# Altium PCB Chov2.PcbDoc
Units mm, origin at the board's own origin, x right, y up, seen from the top; angles counter-clockwise.
Board outline 57 x 36.4 mm, 2 copper layers (Top Layer, Bottom Layer); 66 components, 86 nets, 235 pads, 36 vias.
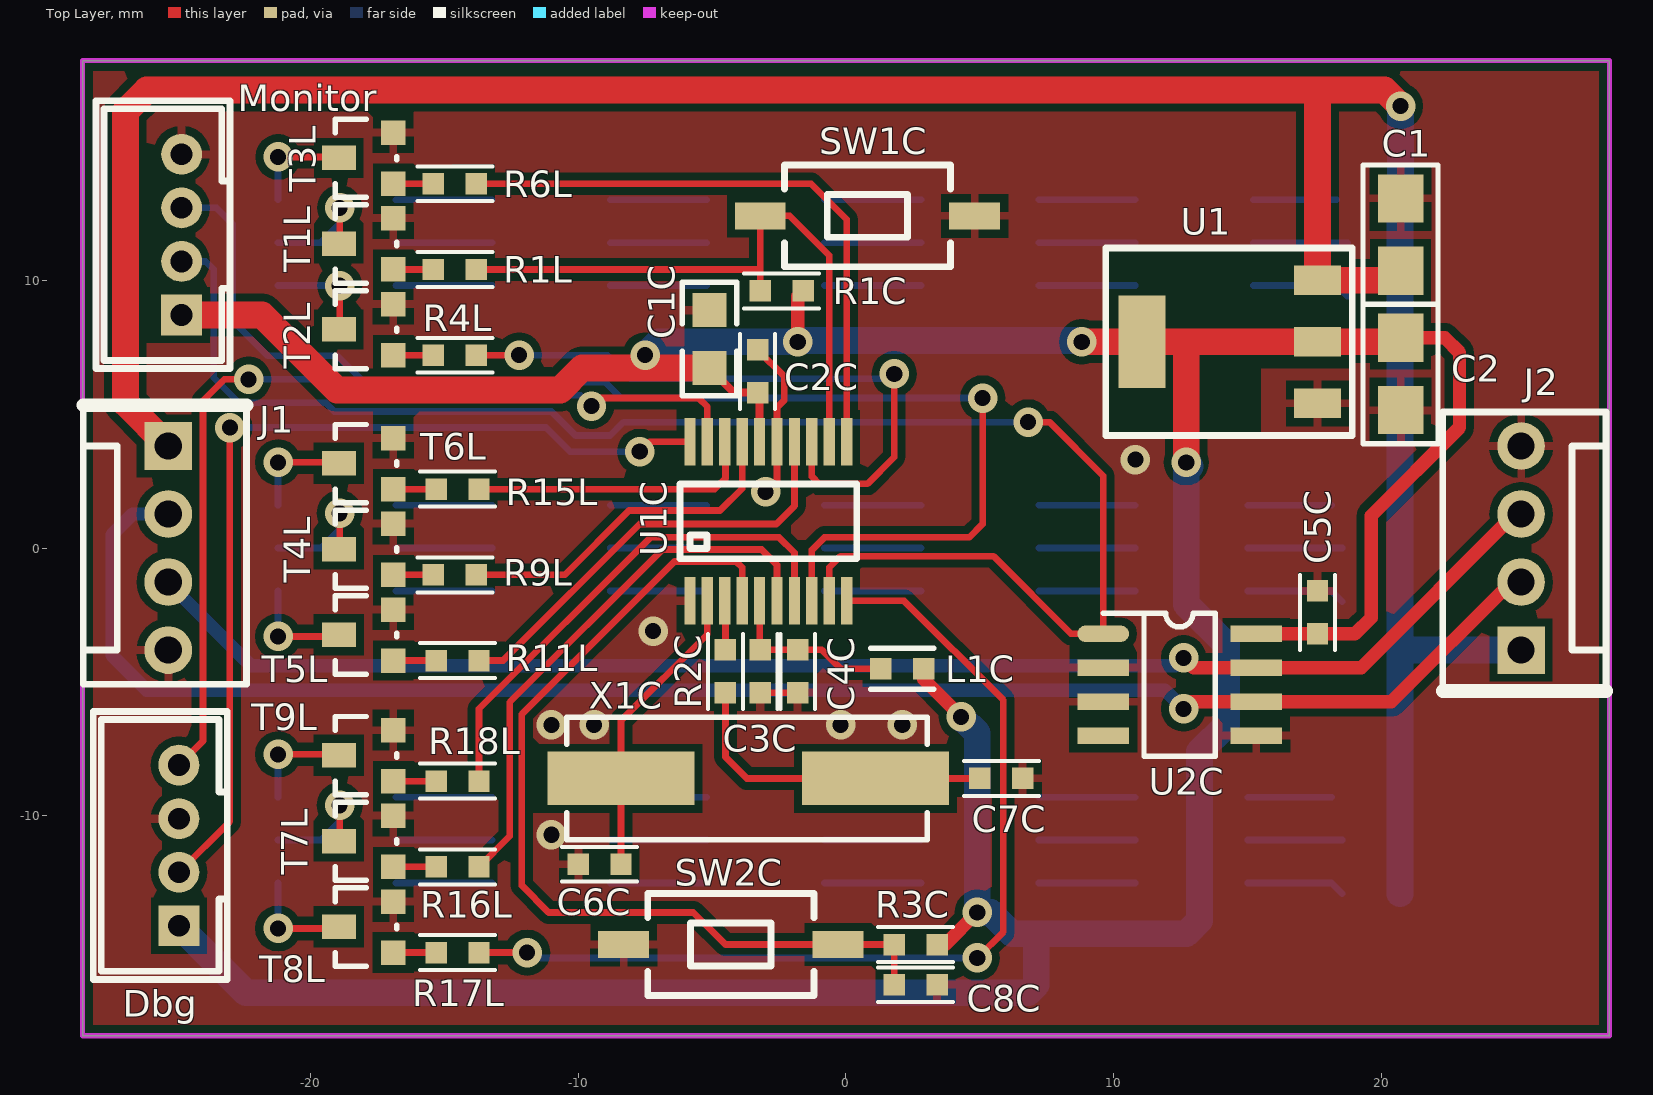
[diagram p0: Top Layer view]
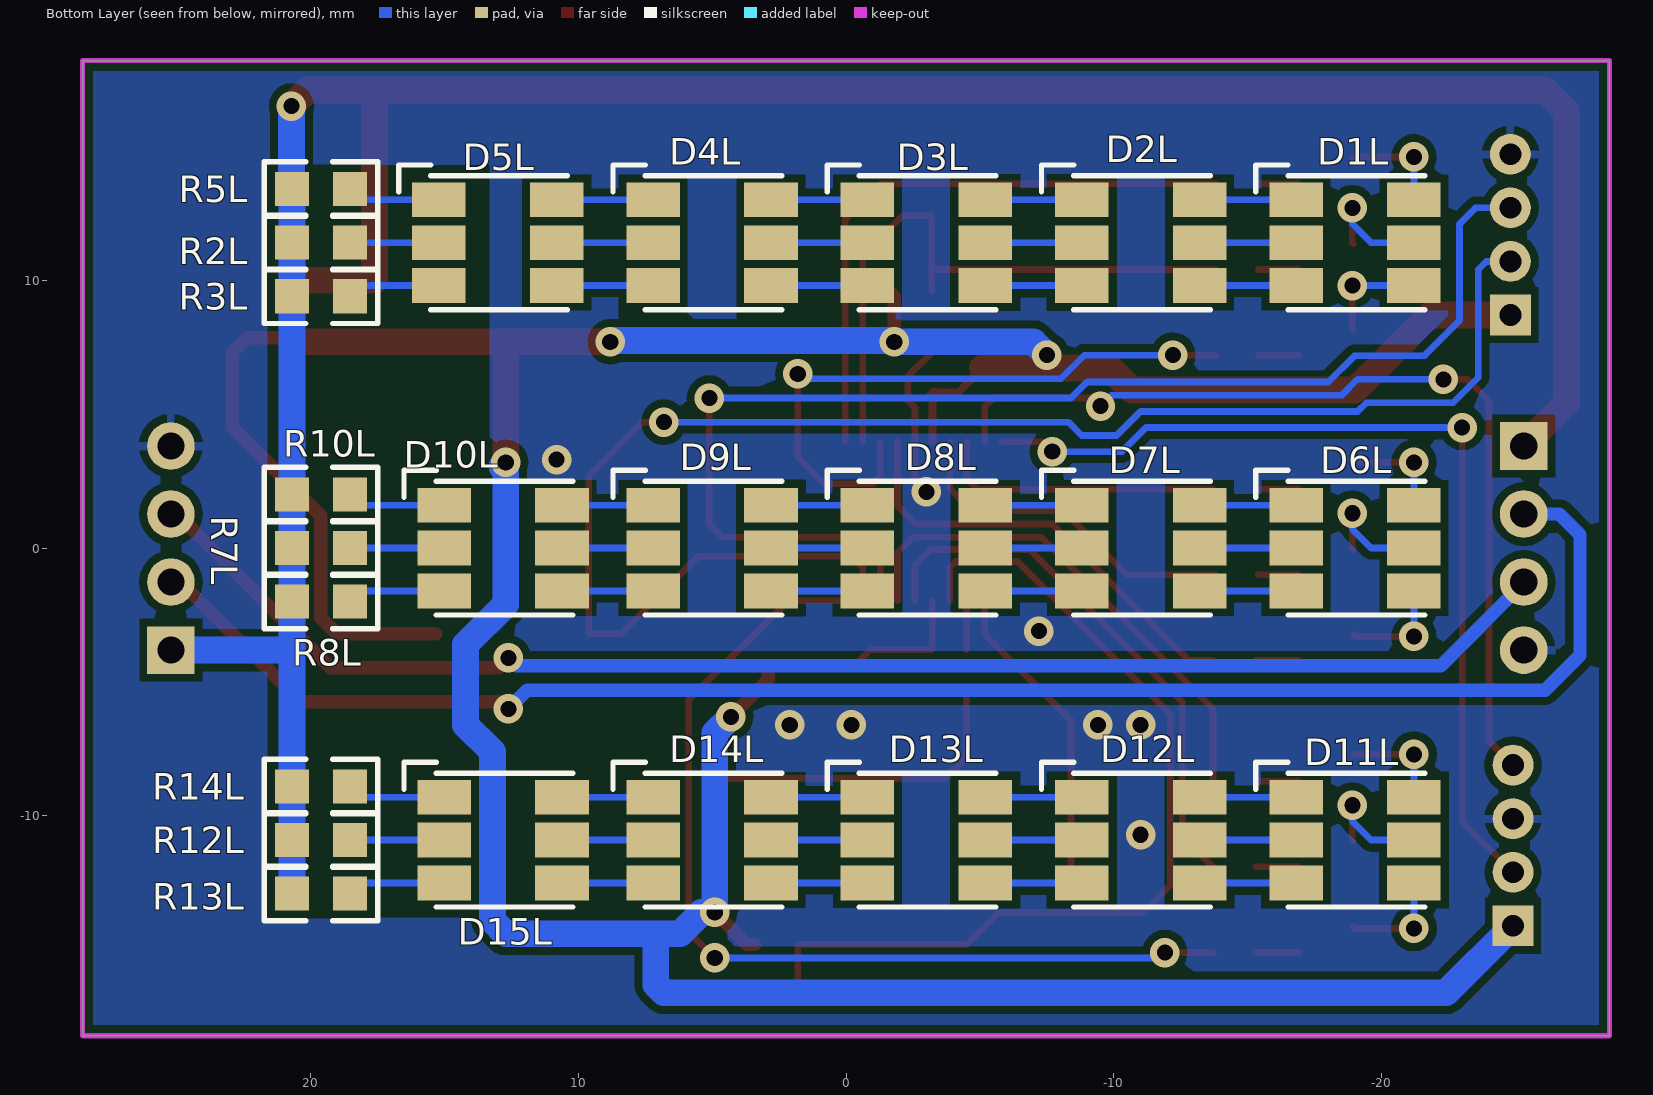
[diagram p1: Bottom Layer view, seen from below]

## Layer stack, top to bottom
Top Solder: solder mask 0.0102, Solder Resist, Dk 3.5
Top Layer: signal copper 0.0356
Dielectric1: dielectric 0.32, FR-4, Dk 4.8
Bottom Layer: signal copper 0.0356
Bottom Solder: solder mask 0.0102, Solder Resist, Dk 3.5

## Board outline
-28.5,-18.2 28.5,-18.2 28.5,18.2 -28.5,18.2

## Design rules (kind name [scope] priority, off if disabled: settings)
Clearance InPolyClearance [InPoly] p1: gap=0.3 ignorepadtopadclearanceinfootprint=FALSE except(0: Arc-Hole Track-Hole SMDPad-Hole THPad-Hole Via-Hole Fill-Hole Poly-Hole Region-Hole Text-Hole)
Clearance [All] p2: gap=0.2 ignorepadtopadclearanceinfootprint=FALSE except(0: Arc-Hole Track-Hole SMDPad-Hole THPad-Hole Via-Hole Fill-Hole Poly-Hole Region-Hole Text-Hole)
ComponentClearance [All] p1 off: gap=0.254 collisioncheckmode=3 verticalgap=0.254 showdistances=FALSE
Height [All] p1: minheight=0 maxheight=40 prefheight=12.7
HoleSize [All] p1: absolutevalues=TRUE maxlimit=6 minlimit=0.025 maxpercent=80.000 minpercent=20.000
MinimumSolderMaskSliver [not(IsComponentPrimitive and OnSolderMask)] p1: minsoldermaskwidth=0.1
PolygonConnect PolygonConnectDirect [IsVia] p1: connectstyle=Direct reliefconductorwidth=0.254 reliefentries=4 polygonreliefangle="90 Angle" airgapwidth=0.254
PolygonConnect PolygonConnectElse [All] p2: connectstyle=Relief reliefconductorwidth=0.3 reliefentries=4 polygonreliefangle="90 Angle" airgapwidth=0.254
RoutingVias [All] p1: holewidth=0.6 width=1.1 viastyle="Through Hole" minholewidth=0.5 minwidth=1 maxholewidth=2 maxwidth=4
SilkToSilkClearance [All] p1 off: silktosilkclearance=0.254
SilkToSolderMaskClearance SilkscreenOverComponentPads [IsPad] p1: minsilkscreentomaskgap=0.1 clearancetoexposedcopper=TRUE
SolderMaskExpansion [All] p1: expansion=0.102 istentingtop=FALSE
Width [All] p1: maxlimit=4 minlimit=0.2 preferedwidth=0.3
24 further rules are at their usual default settings.

## Classes and differential pairs
component class Chov2_main: C1 C2 J1 J2 U1
component class CPU: C1C C2C C3C C4C C5C C6C C7C C8C Dbg L1C Monitor R1C R2C R3C SW1C SW2C U1C U2C X1C
component class LED: D1L D2L D3L D4L D5L D6L D7L D8L D9L D10L D11L D12L D13L D14L D15L R1L R2L R3L R4L R5L R6L R7L R8L R9L R10L R11L R12L R13L R14L R15L R16L R17L R18L T1L T2L T3L T4L T5L T6L T7L T8L T9L
net class CLED[8..0]: CLED0 CLED1 CLED2 CLED3 CLED4 CLED5 CLED6 CLED7 CLED8

## Components (designator, comment, footprint, x,y, rotation, side; value= is the part's Value field where it differs from the comment)
C1 "C0805C105K4RAC" 1206_0805 20.7,11.7 r90 top
C1C "0805YC475KAT2A" 0805 -5.1,7.8 r90 top
C2 "C0805C105K4RAC" 1206_0805 20.7,6.5 r270 top
C2C "CL10B104KA8NNNC" 0603-IPC -3.3,6.6 r90 top
C3C "CL10B105KO8NNNC" 0603-IPC -3.2,-4.6 r270 top
C4C "CL10B104KA8NNNC" 0603-IPC -1.8,-4.6 r270 top
C5C "CL10B104KA8NNNC" 0603-IPC 17.6,-2.4 r90 top
C6C "CL10C220JB8NNNC" 0603-IPC -9.2,-11.8 r0 top
C7C "CL10C220JB8NNNC" 0603-IPC 5.8,-8.6 r180 top
C8C "CL10B104KA8NNNC" 0603-IPC 2.6,-16.3 r0 top
D1L "OF-SMD5060RGB-W" OF-SMD5060RGB-W -19,11.4 r180 bottom locked
D2L "OF-SMD5060RGB-W" OF-SMD5060RGB-W -11,11.4 r180 bottom locked
D3L "OF-SMD5060RGB-W" OF-SMD5060RGB-W -3,11.4 r180 bottom locked
D4L "OF-SMD5060RGB-W" OF-SMD5060RGB-W 5,11.4 r180 bottom locked
D5L "OF-SMD5060RGB-W" OF-SMD5060RGB-W 13,11.4 r180 bottom locked
D6L "OF-SMD5060RGB-W" OF-SMD5060RGB-W -19,0 r180 bottom locked
D7L "OF-SMD5060RGB-W" OF-SMD5060RGB-W -11,0 r180 bottom locked
D8L "OF-SMD5060RGB-W" OF-SMD5060RGB-W -3,0 r180 bottom locked
D9L "OF-SMD5060RGB-W" OF-SMD5060RGB-W 5,0 r180 bottom locked
D10L "OF-SMD5060RGB-W" OF-SMD5060RGB-W 12.8,0 r180 bottom locked
D11L "OF-SMD5060RGB-W" OF-SMD5060RGB-W -19,-10.9 r180 bottom locked
D12L "OF-SMD5060RGB-W" OF-SMD5060RGB-W -11,-10.9 r180 bottom locked
D13L "OF-SMD5060RGB-W" OF-SMD5060RGB-W -3,-10.9 r180 bottom locked
D14L "OF-SMD5060RGB-W" OF-SMD5060RGB-W 5,-10.9 r180 bottom locked
D15L "OF-SMD5060RGB-W" OF-SMD5060RGB-W 12.8,-10.9 r180 bottom locked
Dbg "WS04S" WS04S -24.9,-11.1 r90 top
J1 "WF04S" WF04S -25.3,0 r270 top locked
J2 "WF04S" WF04S 25.2,0 r90 top
L1C "BLM18AG102SN1D" 0603 2.1,-4.5 r0 top
Monitor "WS04S" WS04S -24.8,11.7 r90 top
R1C "RC0603FR-07100KL" 0603-IPC -2.4,9.6 r180 top
R1L "0603WGF10KT5E" 0603-IPC -14.6,10.4 r180 top
R2C "0603SAF2200T5E" 0603-IPC -4.5,-4.6 r90 top
R2L "0805S8F100JT5E" 0805 19.6,11.4 r0 bottom locked
R3C "RC0603FR-07100KL" 0603-IPC 2.6,-14.8 r180 top
R3L "0805S8F100JT5E" 0805 19.6,9.4 r0 bottom locked
R4L "0603WGF10KT5E" 0603-IPC -14.6,7.2 r180 top
R5L "0805S8F100JT5E" 0805 19.6,13.4 r0 bottom locked
R6L "0603WGF10KT5E" 0603-IPC -14.6,13.6 r180 top
R7L "0805S8F100JT5E" 0805 19.6,0 r0 bottom locked
R8L "0805S8F100JT5E" 0805 19.6,-2 r0 bottom locked
R9L "0603WGF10KT5E" 0603-IPC -14.6,-1 r180 top
R10L "0805S8F100JT5E" 0805 19.6,2 r0 bottom locked
R11L "0603WGF10KT5E" 0603-IPC -14.5,-4.2 r180 top
R12L "0805S8F100JT5E" 0805 19.6,-10.9 r0 bottom locked
R13L "0805S8F100JT5E" 0805 19.6,-12.9 r0 bottom locked
R14L "0805S8F100JT5E" 0805 19.6,-8.9 r0 bottom locked
R15L "0603WGF10KT5E" 0603-IPC -14.5,2.2 r180 top
R16L "0603WGF10KT5E" 0603-IPC -14.5,-11.9 r180 top
R17L "0603WGF10KT5E" 0603-IPC -14.5,-15.1 r180 top
R18L "0603WGF10KT5E" 0603-IPC -14.5,-8.7 r180 top
SW1C "TACTD37H25I180" TACTD37H25I180 0.8,12.4 r180 top
SW2C "TACTD37H25I180" TACTD37H25I180 -4.3,-14.8 r0 top
T1L "BC817" SOT23-3 -16.9,10.4 r90 top
T2L "BC817" SOT23-3 -16.9,7.2 r90 top
T3L "BC817" SOT23-3 -16.9,13.6 r90 top
T4L "BC817" SOT23-3 -16.9,-1 r90 top
T5L "BC817" SOT23-3 -16.9,-4.2 r90 top
T6L "BC817" SOT23-3 -16.9,2.2 r90 top
T7L "BC817" SOT23-3 -16.9,-11.9 r90 top
T8L "BC817" SOT23-3 -16.9,-15.1 r90 top
T9L "BC817" SOT23-3 -16.9,-8.7 r90 top
U1 "APE1117AK-33-HF-3" SOT-223 17.6,5.4 r90 top
U1C "STM32F030F4P6" MO-153AC -2.9,1 r0 top
U2C "ST3485EB" 8SOIC150 9.6,-3.2 r0 top
X1C "8.00MHz" HC49SMP -8.4,-8.6 r0 top

## Footprints (in the part's own frame and the unit in brackets; to place one, negate y for a bottom-side part, rotate by r counter-clockwise, add the part's x,y. Pads: shape width x height; smd on the part's side, far side on the other; paste and mask are expansions set on the pad)
8SOIC150 [mil]
  oval 76x24 smd: 1(0,0)
  rect 76x24 smd: 2(0,-50) 3(0,-100) 4(0,-150) 5(225,-150) 6(225,-100) 7(225,-50) 8(225,0)
  silkscreen extent 0,-180 165,30, body extent -10,-173 235,23, height 67
0603 [mm]
  rect 0.8x0.8 smd: 1(-0.8,0) 2(0.8,0)
  silkscreen extent -1.17,-0.76 1.17,0.76, body extent -0.8,-0.4 0.8,0.4, height 1
0603-IPC [mm]
  rect 0.8x0.8 smd: 1(-0.8,0) 2(0.8,0)
  silkscreen extent -1.4,-0.65 1.4,0.65, body extent -0.8,-0.4 0.8,0.4, height 1
0805 [mil]
  rect 50x50 smd: 1(-42.5,0) 2(42.5,0)
  silkscreen extent -84,-40 84,40, body extent -39,-28 39,28, height 51
1206_0805 [mm]
  rect 1.8x1.7 smd: 1(-1.35,0) 2(1.35,0)
  silkscreen extent -2.6,-1.4 2.6,1.4, body extent -1.7,-0.89 1.7,0.89, height 2.56
HC49SMP [mm]
  rect 5.5x2 smd: 1(0,0) 2(9.5,0)
  silkscreen extent -2.03,-2.29 11.43,2.29, body extent -1.6,-2.4 11.1,2.4, height 4.2
MO-153AC [mm]
  rect 0.42x1.78 smd: 1(-2.925,-2.97) 2(-2.275,-2.97) 3(-1.625,-2.97) 4(-0.975,-2.97) 5(-0.325,-2.97) 6(0.325,-2.97) 7(0.975,-2.97) 8(1.625,-2.97) 9(2.275,-2.97) 10(2.925,-2.97) 11(2.925,2.97) 12(2.275,2.97) 13(1.625,2.97) 14(0.975,2.97) 15(0.325,2.97) 16(-0.325,2.97) 17(-0.975,2.97) 18(-1.625,2.97) 19(-2.275,2.97) 20(-2.925,2.97)
  silkscreen extent -3.3,-1.4 3.3,1.4, body extent -3.25,-3.2 3.25,3.2, height 1.2
OF-SMD5060RGB-W [mm]
  rect 2x1.3 smd: 1(-2.2,1.6) 2(-2.2,0) 3(-2.2,-1.6) 4(2.2,1.6) 5(2.2,0) 6(2.2,-1.6)
  silkscreen extent -3.7,-2.5 2.6,2.9, body extent -2.9,-2.5 2.9,2.5, height 1.7
SOT23-3 [mil]
  rect 36x36 smd: 1(0,0) 2(75,0)
  rect 36x50 smd: 3(38,80)
  silkscreen extent -20,-5 95,85, body extent -22,-7 97,87, height 43
SOT-223 [mm]
  rect 1.1x1.75 smd: 1(0,0) 2(2.3,0) 3(4.6,0)
  rect 3.45x1.75 smd: 4(2.3,6.55)
  silkscreen extent -1.2,-1.3 5.8,7.9, body extent -1,-0.23 5.6,6.78, height 1.6
TACTD37H25I180 [mm]
  rect 1.9x1.016 smd: 1(-4,0) 2(4,0)
  silkscreen extent -3.1,-1.9 3.1,1.9, body extent -4,-1.85 4,1.85, height 2.5
WF04S [mil]
  rect 70x70 hole 40: 1(-150,0)
  round 70 hole 40: 2(-50,0) 3(50,0) 4(150,0)
  silkscreen extent -210,-125 200,115, body extent -200,-125 200,115, height 453
WS04S [mil]
  rect 60x60 hole 32: 1(-118.11,0)
  round 60 hole 32: 2(-39.37,0) 3(39.37,0) 4(118.11,0)
  silkscreen extent -197,-71 197,126, body extent -197,-71 197,126, height 236

## Part data
C1 C2: library part C0805C105K4RAC[[/\]]0805[[/\]]16V[[/\]]10%[[/\]]1u/16V
C1C: library part 0805YC475KAT2A[[/\]]0805[[/\]]16V[[/\]]10%[[/\]]4u7/16V
C2C C4C C5C C8C: library part CL10B104KA8NNNC[[/\]]0603[[/\]]25V[[/\]]10%[[/\]]100n/25V
C3C: library part CL10B105KO8NNNC[[/\]]0603[[/\]]16V[[/\]]10%[[/\]]1u/16V
C6C C7C: library part "CL10C220JB8NNNC[[/\]]0603[[/\]]50V[[/\]]5%[[/\]]22p/50V 5%"
D1L D2L D3L D4L D5L D6L D7L D8L D9L D10L D11L D12L D13L D14L D15L: library part OF-SMD5060RGB-W[[/\]]5060
Dbg Monitor: library part WS04S[[/\]]8x12mm
J1 J2: library part WF04S[[/\]]WF04S
L1C: library part BLM18AG102SN1D[[/\]]0603[[/\]]BLM18AG102SN1D
R1C R3C: library part "RC0603FR-07100KL[[/\]]0603[[/\]]0.1W[[/\]]1%[[/\]]100k 1%"
R1L R4L R6L R9L R11L R15L R16L R17L R18L: library part "0603WGF10KT5E[[/\]]0603[[/\]]0.1W[[/\]]1%[[/\]]10k 1%"
R2C: library part "0603SAF2200T5E[[/\]]0603[[/\]]0.1W[[/\]]1%[[/\]]220R 1%"
R2L R3L R5L R7L R8L R10L R12L R13L R14L: library part "0805S8F100JT5E[[/\]]0805[[/\]]0.125W[[/\]]1%[[/\]]10R 1%"
SW1C SW2C: library part TACTD37H25I180[[/\]]TACTD37H25I180[[/\]]3.7x6.1x2.5
T1L T2L T3L T4L T5L T6L T7L T8L T9L: library part BC817[[/\]]SOT23-3
U1: library part APE1117AK-33-HF-3[[/\]]SOT-223
U1C: library part STM32F030F4P6[[/\]]MO-153AC
U2C: library part ST3485EB[[/\]]8SOIC150
X1C: library part 8.00MHz[[/\]]HC49/4HSMX[[/\]]8.00MHz

## Via types
v1: diameter 1.1, hole 0.6, Top Layer to Bottom Layer, 36 vias

## Nets (pads, with @x,y where several pads share a name; then routed paths per layer and width w, separated by ;. In a path a pad name is that pad's centre, name@x,y a point inside that pad or via, vN(x,y) a via of type N, cw(c..) or ccw(c..) an arc to the next point about the centre after c; other vN are vias at no path point)
+3V3: C1C.1 C2.1 C2C.1 C5C.1 Dbg.1 L1C.2 Monitor.1 R1C.1 R3C.1 U1.2 U1.4 U1C.16 U2C.8 | length 152.6
  Top Layer w0.3: C1C.1 -4.179,5.8 C2C.1 ; U1C.16 C2C.1@-3.225,5.725
  Top Layer w0.4: C2C.1 C2C.1@-3.225,5.725
  Top Layer w0.5: v1(-1.8,7.7) -1.8,9.4 R1C.1 ; L1C.2 2.9,-4.9 v1(4.3,-6.3) ; R3C.1 3.7,-14.8 v1(4.9,-13.6) ; U2C.8 C5C.1 19,-3.2 19.6,-2.6 19.6,1.2 22.9,4.5 22.9,7.3 22.35,7.85 C2.1
  Top Layer w1: Monitor.1 -21.8,8.7 -19,5.9 -10.668,5.9 -9.847,6.72 -7.3,6.72 C1C.1 ; v1@-7.5,6.92 v1(-7.5,7.2) ; v1(8.8,7.7) U1.4 12.6,7.7 ; v1(12.7,3.2) 12.7,7.6 12.6,7.7 ; C2.1@20.55,7.7 U1.2 12.6,7.7
  Bottom Layer w1: Dbg.1 -22.4,-16.6 6.8,-16.6 7.1,-16.3 7.1,-14.4 ; v1(-7.5,7.2) -7,7.7 v1(-1.8,7.7) ; v1@-1.75,7.75 v1@8.75,7.75 ; v1(4.3,-6.3) 4.9,-6.9 v1(4.9,-13.6) 5.4,-13.6 6.2,-14.4 7.1,-14.4 ; v1@12.85,3.05 v1(12.7,3.2) 12.7,-2.1 14.2,-3.6 14.2,-6.6 13.2,-7.6 13.2,-13.9 12.7,-14.4 7.1,-14.4
+12V: C1.1 J1.1 J2.1 R2L.2 R3L.2 R5L.2 R7L.2 R8L.2 R10L.2 R12L.2 R13L.2 R14L.2 U1.3 | length 105.6
  Top Layer w1: J1.1 -26.9,5.41 -26.9,16.3 -26.1,17.1 17.6,17.1 ; C1.1 20.35,10 U1.3 17.6,17.1 ; v1(20.7,16.5) 20.1,17.1 17.6,17.1
  Bottom Layer w1: R13L.2 20.679,-3.81 R8L.2 R3L.2 R2L.2 R5L.2 20.7,13.421 v1(20.7,16.5) ; 20.689,-3.81 J2.1
APLUS: J1.2 J2.2 U2C.6 | length 62.3
  Top Layer w0.5: v1(12.6,-6) 12.86,-5.74 U2C.6 20.36,-5.74 24.83,-1.27 J2.2
  Bottom Layer w0.5: J1.2 -26.63,1.27 -27.4,0.5 -27.4,-4 -26.1,-5.3 11.9,-5.3 v1(12.6,-6)
BMINUS: J1.3 J2.3 U2C.7 | length 54.5
  Top Layer w0.5: v1(12.6,-4.1) 12.97,-4.47 U2C.7 19.23,-4.47 24.97,1.27 J2.3
  Bottom Layer w0.5: J1.3 -25.3,-1.3 -22.2,-4.4 12.3,-4.4 v1(12.6,-4.1)
CLED0: R1C.2 R1L.1 SW1C.2 U1C.12 | length 23.6
  Top Layer w0.25: R1L.1 -3.3,10.4 -3.2,10.3 ; R1C.2 -3.2,10.3 ; U1C.12 -0.625,10.925 -2.1,12.4 SW1C.2 -3.2,10.3
CLED1: R4L.1 U1C.13 | length 24.2
  Top Layer w0.25: R4L.1 v1(-12.2,7.2) ; U1C.13 -1.275,2.672 -1,2.397 0.797,2.397 1.8,3.4 v1(1.8,6.5)
  Bottom Layer w0.25: v1(-12.2,7.2) -8.9,7.2 -8.025,6.325 1.625,6.325 v1(1.8,6.5) v1@1.675,6.625
CLED2: R6L.1 U1C.11 | length 22.7
  Top Layer w0.25: R6L.1 -1.3,13.6 0.025,12.275 U1C.11
CLED3: R9L.1 U1C.17 | length 13
  Top Layer w0.25: R9L.1 -10.5,-1 -8.1,1.4 -4.7,1.4 -3.875,2.225 U1C.17
CLED4: R11L.1 U1C.14 | length 16.6
  Top Layer w0.25: R11L.1 -12.8,-4.2 -7.7,0.9 -2.6,0.9 -1.925,1.575 U1C.14
CLED5: R15L.1 U1C.18 | length 10.7
  Top Layer w0.25: R15L.1 -4.9,2.2 -4.5,2.6 -4.5,3.945 U1C.18
CLED6: R16L.1 U1C.6 | length 20.5
  Top Layer w0.25: R16L.1 -12.55,-10.75 -12.55,-5.75 -6.85,-0.05 -3.15,-0.05 -2.575,-0.625 U1C.6
CLED7: R17L.1 U1C.10 | length 36.1
  Top Layer w0.25: R17L.1 v1(-11.9,-15.1) ; U1C.10 2.17,-1.97 5.875,-5.675 5.875,-14.325 v1(4.9,-15.3)
  Bottom Layer w0.25: v1(-11.9,-15.1) -11.7,-15.3 v1(4.9,-15.3)
CLED8: R18L.1 U1C.7 | length 19.2
  Top Layer w0.25: R18L.1 -13.7,-6 -7.3,0.4 -2.5,0.4 -1.925,-0.175 U1C.7
GND: C1.2 C1C.2 C2.2 C2C.2 C3C.2 C4C.2 C5C.2 C6C.1 C7C.1 C8C.2 Dbg.3 J1.4 J2.4 Monitor.4 SW1C.1 SW2C.1 T1L.2 T2L.2 T3L.2 T4L.2 T5L.2 T6L.2 T7L.2 T8L.2 T9L.2 U1.1 U1C.1 U1C.15 U2C.2 U2C.3 U2C.5 | length 7.4
  Top Layer w0.25: C2C.2 -2.3,6.4 -2.3,5.525 -2.575,5.25 U1C.15 -2.575,2.525 v1(-3,2.1) ; C3C.2 C4C.2
  other v1: -11,-10.7 -11,-6.6 -9.4,-6.6 -0.2,-6.6 2.1,-6.6 -7.2,-3.1 10.8,3.3
LEDC0: D1L.5 T1L.3 | length 4.5
  Top Layer w0.25: T1L.3 -18.9,11.397 v1(-18.9,12.7)
  Bottom Layer w0.25: D1L.5 -19.6,11.4 -18.9,12.1 v1(-18.9,12.7)
LEDC1: D1L.6 T2L.3 | length 3.9
  Top Layer w0.25: T2L.3 -18.9,8.197 v1(-18.9,9.8)
  Bottom Layer w0.25: D1L.6 v1(-18.9,9.8)
LEDC2: D1L.4 T3L.3 | length 4
  Top Layer w0.25: v1(-21.2,14.6) -18.967,14.6 T3L.3
  Bottom Layer w0.25: D1L.4 -21.2,14.65 v1(-21.2,14.6)
LEDC3: D6L.5 T4L.3 | length 4.5
  Top Layer w0.25: T4L.3 -18.9,-0.003 v1(-18.9,1.3)
  Bottom Layer w0.25: D6L.5 -19.6,0 -18.9,0.7 v1(-18.9,1.3)
LEDC4: D6L.6 T5L.3 | length 4
  Top Layer w0.25: v1(-21.2,-3.3) -18.997,-3.3 T5L.3
  Bottom Layer w0.25: v1(-21.2,-3.3) D6L.6
LEDC5: D6L.4 T6L.3 | length 4
  Top Layer w0.25: v1(-21.2,3.2) -18.967,3.2 T6L.3
  Bottom Layer w0.25: D6L.4 -21.2,3.25 v1(-21.2,3.2)
LEDC6: D11L.5 T7L.3 | length 4.5
  Top Layer w0.25: T7L.3 -18.9,-10.903 v1(-18.9,-9.6)
  Bottom Layer w0.25: D11L.5 -19.6,-10.9 -18.9,-10.2 v1(-18.9,-9.6)
LEDC7: D11L.6 T8L.3 | length 4
  Top Layer w0.25: v1(-21.2,-14.2) -18.997,-14.2 T8L.3
  Bottom Layer w0.25: v1(-21.2,-14.2) D11L.6
LEDC8: D11L.4 T9L.3 | length 4
  Top Layer w0.25: v1(-21.2,-7.7) -18.967,-7.7 T9L.3
  Bottom Layer w0.25: D11L.4 -21.2,-7.65 v1(-21.2,-7.7)
NetC3C_1: C3C.1 C4C.1 L1C.1 U1C.5 | length 6.6
  Top Layer w0.25: C3C.1@-3.225,-3.775 U1C.5 ; C3C.1 C4C.1 -0.9,-3.8 -0.2,-4.5 L1C.1
NetC7C_2: C7C.2 R2C.1 X1C.2 | length 12.2
  Top Layer w0.25: R2C.1 -4.5,-7.8 -3.7,-8.6 X1C.2 C7C.2
NetD1L_1: D1L.1 D2L.4 | length 3.6
  Bottom Layer w0.25: D1L.1 D2L.4
NetD1L_2: D1L.2 D2L.5 | length 3.6
  Bottom Layer w0.25: D1L.2 D2L.5
NetD1L_3: D1L.3 D2L.6 | length 3.6
  Bottom Layer w0.25: D1L.3 D2L.6
NetD2L_1: D2L.1 D3L.4 | length 3.6
  Bottom Layer w0.25: D2L.1 D3L.4
NetD2L_2: D2L.2 D3L.5 | length 3.6
  Bottom Layer w0.25: D2L.2 D3L.5
NetD2L_3: D2L.3 D3L.6 | length 3.6
  Bottom Layer w0.25: D2L.3 D3L.6
NetD3L_1: D3L.1 D4L.4 | length 3.6
  Bottom Layer w0.25: D3L.1 D4L.4
NetD3L_2: D3L.2 D4L.5 | length 3.6
  Bottom Layer w0.25: D3L.2 D4L.5
NetD3L_3: D3L.3 D4L.6 | length 3.6
  Bottom Layer w0.25: D3L.3 D4L.6
NetD4L_1: D4L.1 D5L.4 | length 3.6
  Bottom Layer w0.25: D4L.1 D5L.4
NetD4L_2: D4L.2 D5L.5 | length 3.6
  Bottom Layer w0.25: D4L.2 D5L.5
NetD4L_3: D4L.3 D5L.6 | length 3.6
  Bottom Layer w0.25: D4L.3 D5L.6
NetD5L_1: D5L.1 R5L.1 | length 3.1
  Bottom Layer w0.25: D5L.1 R5L.1@18.32,13
NetD5L_2: D5L.2 R2L.1 | length 3.5
  Bottom Layer w0.25: D5L.2 R2L.1@18.721,11.4
NetD5L_3: D5L.3 R3L.1 | length 3.7
  Bottom Layer w0.25: D5L.3 18.321,9.8 R3L.1@18.721,9.4
NetD6L_1: D6L.1 D7L.4 | length 3.6
  Bottom Layer w0.25: D6L.1 D7L.4
NetD6L_2: D6L.2 D7L.5 | length 3.6
  Bottom Layer w0.25: D6L.2 D7L.5
NetD6L_3: D6L.3 D7L.6 | length 3.6
  Bottom Layer w0.25: D6L.3 D7L.6
NetD7L_1: D7L.1 D8L.4 | length 3.6
  Bottom Layer w0.25: D7L.1 D8L.4
NetD7L_2: D7L.2 D8L.5 | length 3.6
  Bottom Layer w0.25: D7L.2 D8L.5
NetD7L_3: D7L.3 D8L.6 | length 3.6
  Bottom Layer w0.25: D7L.3 D8L.6
NetD8L_1: D8L.1 D9L.4 | length 3.6
  Bottom Layer w0.25: D8L.1 D9L.4
NetD8L_2: D8L.2 D9L.5 | length 3.6
  Bottom Layer w0.25: D8L.2 D9L.5
NetD8L_3: D8L.3 D9L.6 | length 3.6
  Bottom Layer w0.25: D8L.3 D9L.6
NetD9L_1: D9L.1 D10L.4 | length 3.6
  Bottom Layer w0.25: D9L.1 D10L.4@10.8,1.6
NetD9L_2: D9L.2 D10L.5 | length 3.6
  Bottom Layer w0.25: D9L.2 D10L.5@10.8,0
NetD9L_3: D9L.3 D10L.6 | length 3.6
  Bottom Layer w0.25: D9L.3 D10L.6@10.8,-1.6
NetD10L_1: D10L.1 R10L.1 | length 3.1
  Bottom Layer w0.25: D10L.1 R10L.1@18.12,1.6
NetD10L_2: D10L.2 R7L.1 | length 3.5
  Bottom Layer w0.25: D10L.2 R7L.1
NetD10L_3: D10L.3 R8L.1 | length 3.7
  Bottom Layer w0.25: D10L.3 18.121,-1.6 R8L.1
NetD11L_1: D11L.1 D12L.4 | length 3.6
  Bottom Layer w0.25: D11L.1 D12L.4
NetD11L_2: D11L.2 D12L.5 | length 3.6
  Bottom Layer w0.25: D11L.2 D12L.5
NetD11L_3: D11L.3 D12L.6 | length 3.6
  Bottom Layer w0.25: D11L.3 D12L.6
NetD12L_1: D12L.1 D13L.4 | length 3.6
  Bottom Layer w0.25: D12L.1 D13L.4
NetD12L_2: D12L.2 D13L.5 | length 3.6
  Bottom Layer w0.25: D12L.2 D13L.5
NetD12L_3: D12L.3 D13L.6 | length 3.6
  Bottom Layer w0.25: D12L.3 D13L.6
NetD13L_1: D13L.1 D14L.4 | length 3.6
  Bottom Layer w0.25: D13L.1 D14L.4
NetD13L_2: D13L.2 D14L.5 | length 3.6
  Bottom Layer w0.25: D13L.2 D14L.5
NetD13L_3: D13L.3 D14L.6 | length 3.6
  Bottom Layer w0.25: D13L.3 D14L.6
NetD14L_1: D14L.1 D15L.4 | length 3.6
  Bottom Layer w0.25: D14L.1 D15L.4@10.8,-9.3
NetD14L_2: D14L.2 D15L.5 | length 3.6
  Bottom Layer w0.25: D14L.2 D15L.5@10.8,-10.9
NetD14L_3: D14L.3 D15L.6 | length 3.6
  Bottom Layer w0.25: D14L.3 D15L.6@10.8,-12.5
NetD15L_1: D15L.1 R14L.1 | length 3.1
  Bottom Layer w0.25: D15L.1 R14L.1@18.121,-9.3
NetD15L_2: D15L.2 R12L.1 | length 3.5
  Bottom Layer w0.25: D15L.2 R12L.1
NetD15L_3: D15L.3 R13L.1 | length 3.7
  Bottom Layer w0.25: D15L.3 18.121,-12.5 R13L.1
NetR1L_2: R1L.2 T1L.1 | length 1.5
  Top Layer w0.25: T1L.1 R1L.2
NetR4L_2: R4L.2 T2L.1 | length 1.5
  Top Layer w0.25: T2L.1 R4L.2
NetR6L_2: R6L.2 T3L.1 | length 1.5
  Top Layer w0.25: T3L.1 R6L.2
NetR9L_2: R9L.2 T4L.1 | length 1.5
  Top Layer w0.25: T4L.1 R9L.2
NetR11L_2: R11L.2 T5L.1 | length 1.6
  Top Layer w0.25: T5L.1 R11L.2
NetR15L_2: R15L.2 T6L.1 | length 1.6
  Top Layer w0.25: T6L.1 R15L.2
NetR16L_2: R16L.2 T7L.1 | length 1.6
  Top Layer w0.25: T7L.1 R16L.2
NetR17L_2: R17L.2 T8L.1 | length 1.6
  Top Layer w0.25: T8L.1 R17L.2
NetR18L_2: R18L.2 T9L.1 | length 1.6
  Top Layer w0.25: T9L.1 R18L.2
NRST: C8C.1 R3C.2 SW2C.2 U1C.4 | length 34.6
  Top Layer w0.25: U1C.4 -3.875,-0.725 -4.1,-0.5 -6.4,-0.5 -12.1,-6.2 -12.1,-12.6 -11.1,-13.6 -5.7,-13.6 -4.5,-14.8 SW2C.2 R3C.2 C8C.1
OSC_IN: C6C.2 U1C.2 X1C.1 | length 11.2
  Top Layer w0.25: C6C.2 X1C.1 -8.4,-6.44 -5.175,-3.215 U1C.2
OSC_OUT: R2C.2 U1C.3 | length 1.8
  Top Layer w0.25: U1C.3 -4.5,-1.995 R2C.2
RXD: Monitor.2 U1C.9 U2C.1 | length 59.2
  Top Layer w0.25: U1C.9 -0.625,-0.725 -0.2,-0.3 5.5,-0.3 8.4,-3.2 U2C.1 9.6,2.7 7.6,4.7 v1(6.8,4.7)
  Bottom Layer w0.25: Monitor.2 -23.9,10.7 -23.6,10.4 -23.6,6.363 -22.662,5.425 -19.425,5.425 -19.1,5.1 -11,5.1 -10.1,4.2 -8.8,4.2 -8.3,4.7 v1(6.8,4.7)
SWCLK: Dbg.2 U1C.20 | length 34.9
  Top Layer w0.25: Dbg.2 -23,-10.2 -23,4.6 v1(-23,4.5) ; v1@-7.33,3.97 U1C.20
  Bottom Layer w0.25: v1@-23,4.6 v1(-23,4.5) -11.2,4.5 -10.3,3.6 v1(-7.7,3.6)
SWDIO: Dbg.4 U1C.19 | length 34.9
  Top Layer w0.25: Dbg.4 -24,-7.2 -24,5.5 -23.2,6.3 v1(-22.3,6.3) ; v1@-9.3,5.6 -5.5,5.6 -5.175,5.275 U1C.19
  Bottom Layer w0.25: v1(-22.3,6.3) -19.1,6.3 -18.5,5.7 -9.9,5.7 v1(-9.5,5.3) v1@-9.5,5.163
TXD: Monitor.3 U1C.8 | length 48.5
  Top Layer w0.25: U1C.8 -1.275,-0.075 -0.8,0.4 4.6,0.4 5.1,0.9 v1(5.1,5.6)
  Bottom Layer w0.25: Monitor.3@-24.8,12.526 Monitor.3 -23.5,12.7 -22.9,12.1 -22.9,8.5 -21.575,7.175 -18.975,7.175 -18,6.2 -9,6.2 -8.4,5.6 v1(5.1,5.6) v1@5.075,5.625
pads on no net: U2C.4

## Polygon pours and split planes (outlines as drawn)
GND on Top Layer "GNDTop" (solid, remove dead copper, pour order 1000): -28.3,17.9 28.2,17.9 28.2,-17.9 -28.3,-17.9
GND on Bottom Layer "GNDBot" (solid, remove dead copper, pour order 1001): -28.5,18.2 28.5,18.2 28.5,-18.2 -28.5,-18.2

## Keep-outs
Keep-Out Layer:
  the board outline again, w0.2

## Other copper
Top Layer:
  pour cut-out: 9.7,11.2 18.9,11.2 18.9,6.7 15.5,6.7 15.5,4.2 9.7,4.2
  pour cut-out: -3.95,8 -0.9,8 -0.9,5.2 -3.95,5.2
Bottom Layer:
  pour cut-out: 13.3,14.3 21.6,14.3 21.6,-13.8 13.3,-13.8

## Silkscreen, mask and mechanical layers (free items; w line width, h text height)
Obrys:
  the board outline again, w0.2

## Dimensions
28.5,-18.2 to 28.5,18.2 on Dims
-28.5,-18.2 to 28.5,-18.2 on Dims